# Altium PCB Rooftop_Unit_AgOpenGPS.pcbdoc
Units mm, origin at the board's own origin, x right, y up, seen from the top; angles counter-clockwise.
Board outline 109.35 x 87.6 mm, 2 copper layers (Top Layer, Bottom Layer); 28 components, 32 nets, 177 pads, 45 vias.
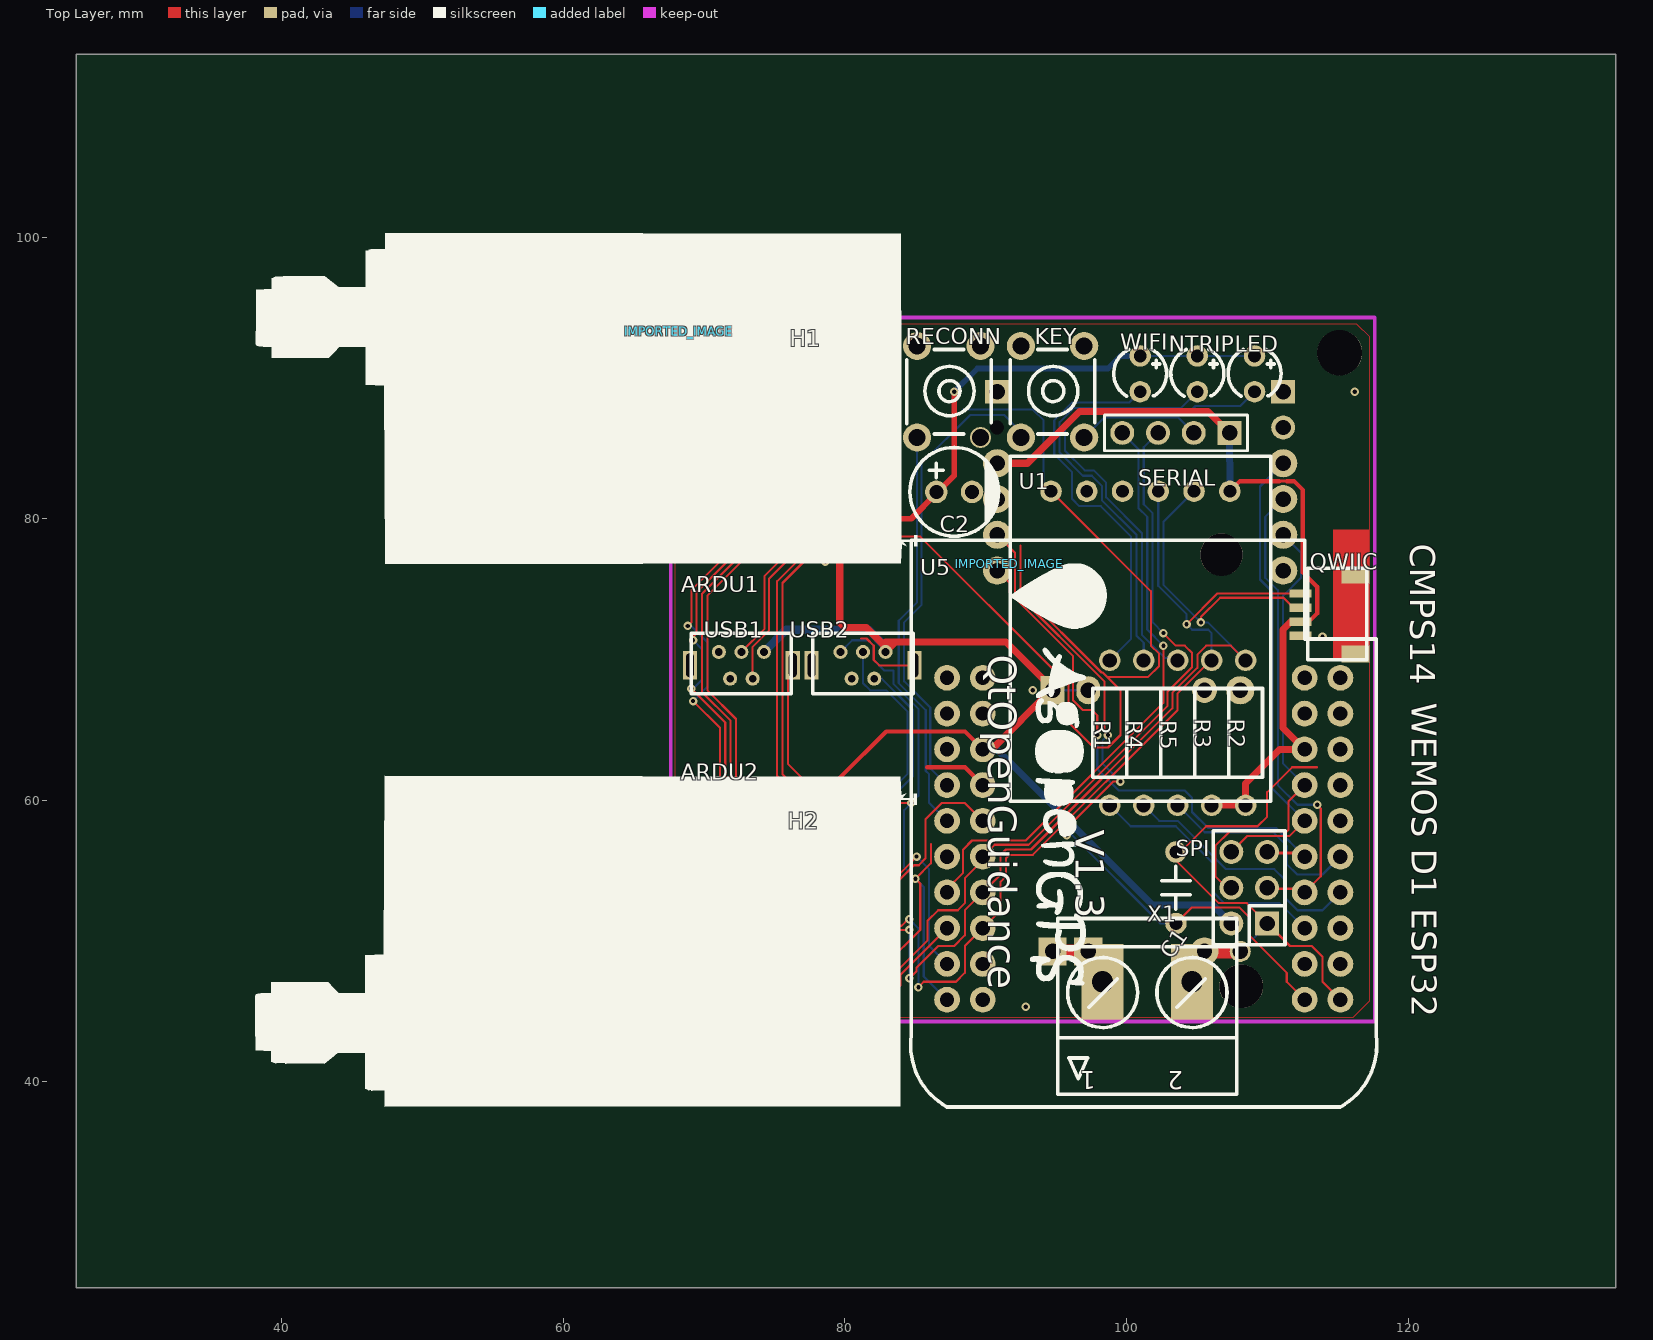
[diagram p0: Top Layer view]
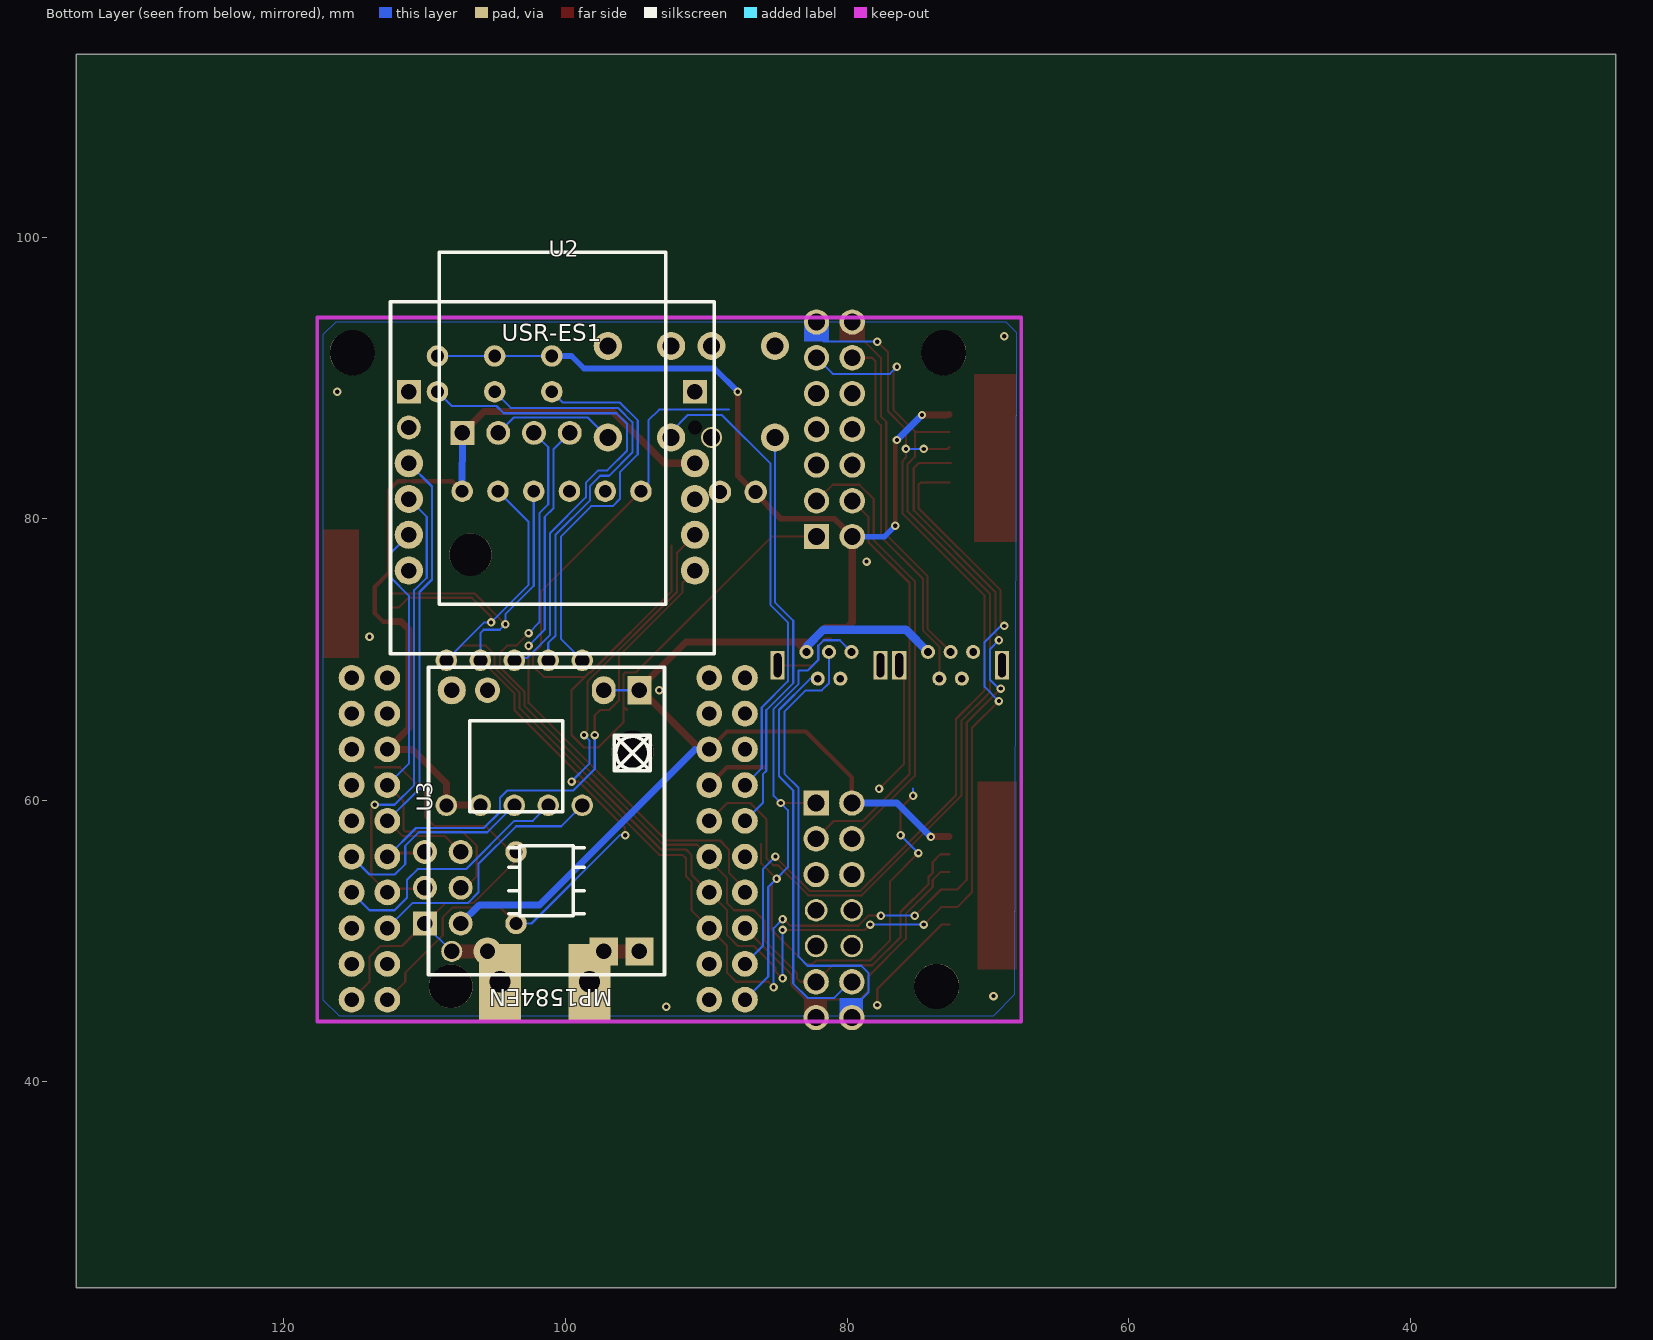
[diagram p1: Bottom Layer view, seen from below]

## Layer stack, top to bottom
Top Layer: signal copper (thickness not stored)
Dielectric: dielectric 0.32, FR-4, Dk 4.8
Bottom Layer: signal copper (thickness not stored)

## Board outline
134.746,25.4 25.4,25.4 25.4,112.998 134.746,112.998

## Components (designator, comment, footprint, x,y, rotation, side; value= is the part's Value field where it differs from the comment)
ARDU1 "SM06B-GHS-TB(LF)(SN)" CONN-TH_SM06B-GHS-TB-LF-SN 70.992,84.298 r270 top
ARDU2 "SM06B-GHS-TB(LF)(SN)" CONN-TH_SM06B-GHS-TB-LF-SN 70.992,54.298 r270 top
C1 "100nF" CAP-TH_L5.0-W2.5-P5.08-D0.7 103.504,53.798 r270 top
C2 "220uF" CAP-TH_BD6.3-P2.50-D1.0-FD 87.756,81.915 r0 top
H1 "A2541WV-2X7P" "ZED-F9P RTK INCASE PIN GNSS RECEIVER" 80.898,85.09 r90 top
H2 "A2541WV-2X7P" "ZED-F9P RTK INCASE PIN GNSS RECEIVER UPSIDE DOWN" 80.898,53.467 r90 top
IMPORTED_IMAGE "IMPORTED_IMAGE" IMPORTED_IMAGE 68.201,93.306 r0 top
IMPORTED_IMAGE "IMPORTED_IMAGE" IMPORTED_IMAGE 91.66,76.822 r0 top
KEY "K2-1102DP-M4SW-04" KEY-TH_4P-L6.0-W6.0-P4.50-LS7.5#1 94.741,89.027 r270 top
LED "BT-102GEK-31-572D" LED-TH_BD3.8-P2.54-FD 109.092,90.297 r270 top
NTRIP "BT-102GEK-31-572D" LED-TH_BD3.8-P2.54-FD 105.028,90.297 r270 top
QWIIC "QWIIC SMD JST" "QWIIC CONNECTOR" 113.156,72.898 r90 top
R1 "2.2K" RES-TH_BD2.4-L6.3-P10.30-D0.6 98.805,64.798 r90 top
R2 "2.2K" RES-TH_BD2.4-L6.3-P10.30-D0.6 108.457,64.798 r270 top
R3 "2.2K" RES-TH_BD2.4-L6.3-P10.30-D0.6 106.044,64.798 r270 top
R4 "2.2K" RES-TH_BD2.4-L6.3-P10.30-D0.6 101.218,64.798 r90 top
R5 "2.2K" RES-TH_BD2.4-L6.3-P10.30-D0.6 103.631,64.798 r90 top
RECONN "K2-1102DP-M4SW-04" KEY-TH_4P-L6.0-W6.0-P4.50-LS7.5#2 87.375,89.027 r270 top
SERIAL "A2541WV-4P" HDR-TH_4P-P2.54-V 103.504,86.106 r180 top
SPI "PM254V-12-06-H85" HDR-TH_6P-P2.54-V-F-R2-C3-S2.54 108.711,53.798 r90 top
U1 "CMPS14" CMPS14 110.235,84.455 r270 top
U2 "USR-ES1" USR-ES1 111.124,89.027 r0 bottom
U3 "MP1584EN" MP1584EN 94.741,49.276 r180 bottom
U5 "TG_WEMOS_D1_ESP32(CLONE)" "WEMOS-D1 ESP32" 115.188,43.307 r180 top
USB1 "USB-MINI-6.9X10.H-H3.9-DIP-V" MINI-USB-TH_C13453 72.643,69.596 r180 top
USB2 "USB-MINI-6.9X10.H-H3.9-DIP-V" MINI-USB-TH_C13453 81.279,69.596 r180 top
WIFI "BT-102GEK-31-572D" LED-TH_BD3.8-P2.54-FD 100.964,90.297 r270 top
X1 "AKL701_215" AKL701_2_15 101.472,47.117 r0 top

## Footprints (in the part's own frame and the unit in brackets; to place one, negate y for a bottom-side part, rotate by r counter-clockwise, add the part's x,y. Pads: shape width x height; smd on the part's side, far side on the other; paste and mask are expansions set on the pad)
AKL701_2_15 [mil]
  rect 118.15x212.6 hole 59: 1(-125,0) 2(125,0)
  silkscreen extent -250,-315 250,177
CAP-TH_BD6.3-P2.50-D1.0-FD [mm]
  round 1.6 hole 1: 1(-1.27,0) 2(1.27,0)
  silkscreen extent -3.15,-3.15 3.17,3.15
CAP-TH_L5.0-W2.5-P5.08-D0.7 [mil]
  round 60 hole 36: 1(-100,0) 2(100,0)
  silkscreen extent -60,-40 60,40
CMPS14 [mm]
  round 1.524 hole 0.914: 1(2.5,-2.9) 2(2.5,-5.44) 3(2.5,-7.98) 4(2.5,-10.52) 5(2.5,-13.06) 6(2.5,-15.6)
  round 3 hole 3 unplated: ""(7,-3.5) ""(21,-15)
  silkscreen extent 0,-18.5 24.5,0
CONN-TH_SM06B-GHS-TB-LF-SN [mil]
  rect 23.6x67 smd: 1(-123.05,68.87) 2(-73.84,68.87) 4(24.59,68.88) 5(73.8,68.88)
  rect 23.7x67 smd: 3(-24.62,68.88) 6(123.01,68.88)
  rect 39.4x106.3 smd: 7(-195.85,-68.86) 8(195.85,-68.87)
  silkscreen extent -182,-118 182,97
HDR-TH_4P-P2.54-V [mm]
  rect 1.7x1.7 hole 1.1: 1(-3.81,0)
  round 1.7 hole 1.1: 2(-1.27,0) 3(1.27,0) 4(3.81,0)
  silkscreen extent -5.08,-1.27 5.08,1.27
HDR-TH_6P-P2.54-V-F-R2-C3-S2.54 [mm]
  rect 1.7x1.7 hole 1.1: 1(-2.54,-1.27)
  round 1.7 hole 1.1: 2(-2.54,1.27) 3(0,-1.27) 4(0,1.27) 5(2.54,-1.27) 6(2.54,1.27)
  silkscreen extent -4.04,-2.54 4.04,2.54
IMPORTED_IMAGE [mm]
KEY-TH_4P-L6.0-W6.0-P4.50-LS7.5#1 [mm]
  round 2 hole 1.2: 1(-3.25,-2.25) 2(3.25,-2.25) 3(3.25,2.25) 4(-3.25,2.25)
  silkscreen extent -3,-3 3,3
KEY-TH_4P-L6.0-W6.0-P4.50-LS7.5#2 [mm]
  round 2 hole 1.2: 1(-3.25,-2.25) 2(3.25,-2.25) 4(-3.25,2.25)
  round 1.5 hole 1.2: 3(3.25,2.25)
  silkscreen extent -3,-3 3,3
LED-TH_BD3.8-P2.54-FD [mil]
  round 60 hole 35.43: 1(-50,0) 2(50,0)
  silkscreen extent -68,-74 63,74
MINI-USB-TH_C13453 [mm]
  round 1 hole 0.55: 1(-1.6,-0.95) 2(-0.8,0.95) 3(0,-0.95) 4(0.8,0.95) 5(1.6,-0.95)
  rect 1x2 hole 0.55 slot 1.7 at 90 deg: 6(3.65,0) 7(-3.65,0)
  silkscreen extent -3.56,-2.29 3.56,2.03
MP1584EN [mm]
  rect 2x2 hole 1.1: 1(-2.54,0) 1(0,0)
  round 1.5 hole 1.1: 2(-13.335,0)
  round 2 hole 1.1: 2(-10.795,0) 4(-13.335,18.55)
  oval 1.7x1.999 hole 1.1: 3(-2.54,18.55)
  rect 1.7x2 hole 1.1: 3(0,18.55)
  round 1.8 hole 1.1: 4(-10.795,18.55)
  silkscreen extent -14.99,-1.65 1.78,20.19
"QWIIC CONNECTOR" [mm]
  rect 0.6x1.55 smd: 1(-1.2,0.8) 2(-0.2,0.8) 3(0.8,0.8) 4(1.8,0.8)
  rect 1.2x2 smd: 5(3.1,-3.1) 6(-2.5,-3.1)
  silkscreen extent -2.9,-3.9 3.6,0.3
RES-TH_BD2.4-L6.3-P10.30-D0.6 [mm]
  round 1.524 hole 1: 1(-5.15,0) 2(5.15,0)
  silkscreen extent -3.15,-1.2 3.15,1.2
USR-ES1 [mm]
  rect 1.7x1.7 hole 1.1: 1(0,0) 12(-20.32,0)
  round 1.7 hole 1.1: 2(0,2.54)
  round 2 hole 1.1: 3(0,5.08) 4(0,7.62) 5(0,10.16) 6(0,12.7) 7(-20.32,12.7) 8(-20.32,10.16) 9(-20.32,7.62) 10(-20.32,5.08)
  round 0.1 hole 1 unplated: 11(-20.32,2.54)
  silkscreen extent -21.7,-9.9 1.3,18.6
"WEMOS-D1 ESP32" [mil]
  round 72 hole 40: 1(0,-100) 2(100,-100) 3(1000,-100) 4(1100,-100) 5(0,-200) 6(100,-200) 7(1000,-200) 8(1100,-200) 9(0,-300) 10(100,-300) 11(1000,-300) 12(1100,-300) 13(0,-400) 14(100,-400) 15(1000,-400) 16(1100,-400) 17(0,-500) 18(100,-500) 19(1000,-500) 20(1100,-500) 21(0,-600) 22(100,-600) 23(1000,-600) 24(1100,-600) 25(0,-700) 26(100,-700) 27(1000,-700) 28(1100,-700) 29(0,-800) 30(100,-800) 31(1000,-800) 32(1100,-800) 33(0,-900) 34(100,-900) 35(1000,-900) 36(1100,-900) 37(0,-1000) 38(1000,-1000) 39(100,-1000) 40(1100,-1000)
  silkscreen extent -102,-1384 1202,200
"ZED-F9P RTK INCASE PIN GNSS RECEIVER" [mm]
  rect 1.8x1.8 hole 1.2: 1(-6.35,-1.27)
  round 1.8 hole 1.2: 2(-6.35,1.27) 3(-3.81,-1.27) 4(-3.81,1.27) 5(-1.27,-1.27) 6(-1.27,1.27) 7(1.27,-1.27) 8(1.27,1.27) 9(3.81,-1.27) 10(3.81,1.27) 11(6.35,-1.27) 12(6.35,1.27) 13(8.89,-1.27) 14(8.89,1.27)
  silkscreen extent -8.29,-4.25 15.21,42.76
"ZED-F9P RTK INCASE PIN GNSS RECEIVER UPSIDE DOWN" [mm]
  rect 1.8x1.8 hole 1.2 copper offset 0.001,-0.001: 1(6.349,-1.299)
  round 1.8 hole 1.2: 2(6.349,1.241) 3(3.809,-1.299) 4(3.809,1.241) 5(1.269,-1.299) 6(1.269,1.241) 11(-6.351,-1.299) 12(-6.351,1.241) 13(-8.891,-1.299) 14(-8.891,1.241)
  round 1.6 hole 1.2: 7(-1.271,-1.299) 8(-1.271,1.241) 9(-3.811,-1.299) 10(-3.811,1.241)
  silkscreen extent -15.23,-4.21 8.27,42.8

## Free pads (board coordinates)
  round 3.2 hole 3.2 unplated: ""(73.14,91.798) ""(73.64,46.798) ""(115.14,91.798)
  round 0.9 hole 0.9 unplated: ""(90.804,86.487)
  round 3.1 hole 3.1 unplated: ""(108.14,46.798)

## Via types
v1: diameter 0.6, hole 0.3, Top Layer to Bottom Layer, 38 vias
v2: diameter 0.61, hole 0.305, Top Layer to Bottom Layer, 7 vias

## Nets (pads, with @x,y where several pads share a name; then routed paths per layer and width w, separated by ;. In a path a pad name is that pad's centre, name@x,y a point inside that pad or via, vN(x,y) a via of type N, cw(c..) or ccw(c..) an arc to the next point about the centre after c; other vN are vias at no path point)
+3V3: QWIIC.2 R2.2 R3.2 SERIAL.1 U1.1 U2.10 U5.30 | length 64
  Top Layer w0.2: U1.1 108.057,82.677 111.405,82.677
  Top Layer w0.3: U1.1 108.057,82.677 110.844,82.677 ; 111.404,82.677 111.886,82.677 112.521,82.042 112.521,76.187 113.537,75.171 113.537,73.279 112.956,72.697 QWIIC.2
  Top Layer w0.5: U2.10 92.963,83.947 96.646,87.63 105.79,87.63 SERIAL.1 ; R3.2@106.044,59.69 R2.2@108.457,59.69 ; R2.2 108.457,61.214 110.87,63.627 U5.30 111.124,65.151 111.124,69.723 ; 111.124,68.468 111.124,72.136 111.686,72.698 QWIIC.2
  Bottom Layer w0.5: SERIAL.1 U1.1
+5V: ARDU1.1 ARDU2.1 C2.1 H1.2 H2.2 LED.1 NTRIP.1 SPI.2 U3.3 U5.31 USB1.1 USB2.1 WIFI.1 | length 141.5
  Top Layer w0.3: v1(76.453,85.598) 76.58,85.598 v1(76.58,79.502) ; H2.2 79.658,61.625 82.93,64.897 88.518,64.897 U5.31
  Top Layer w0.4: H1.2 80.898,80.01 84.708,80.01 C2.1@86.486,81.788 ; C2.1 C2.1@86.486,81.788 ; v1(87.756,89.027) 87.756,83.058 C2.1@86.486,81.788
  Top Layer w0.5: ARDU2.1@72.742,57.423 74.021,57.423 v1(74.04,57.404) ; ARDU1.1 72.946,87.376 v1(74.675,87.376) ; H1.2 79.628,72.644 80.009,72.263 81.533,72.263 82.879,70.917 USB2.1 83.58,71.247 91.439,71.247 94.741,67.945 90.423,63.627 U5.31 ; 82.879,71.252 83.987,71.247
  Bottom Layer w0.15: U3.3@94.741,67.826 U3.3@97.281,67.826 ; WIFI.1 LED.1
  Bottom Layer w0.4: v1(76.58,79.502) 77.342,78.74 H1.2 ; v1(87.756,89.027) 89.407,90.678 98.678,90.678 99.567,91.567 WIFI.1
  Bottom Layer w0.5: v1(74.04,57.404) 76.453,59.817 H2.2@79.658,59.817 ; v1(74.675,87.376) v1(76.453,85.598) ; U5.31 90.804,63.627 101.853,52.578 106.12,52.578 SPI.2
  Bottom Layer w0.6: USB1.1 75.833,72.136 81.66,72.136 82.879,70.917 USB2.1
_KEY1: RECONN.2 U5.24 | length 29.2
  Bottom Layer w0.15: RECONN.2@85.125,85.778 85.125,74.077 83.819,72.771 83.819,68.326 85.739,66.406 85.739,62.088 85.978,61.849 85.978,59.817 U5.24
_KEY2: KEY.2 U5.28 | length 34.5
  Bottom Layer w0.15: U5.28@87.756,61.087 U5.28 86.057,62.278 86.057,66.596 84.2,68.453 84.2,72.644 85.427,73.871 85.427,83.904 88.899,87.376 91.312,87.376 92.491,86.197 KEY.2@92.491,85.778
_LED1: R1.1 U5.10 | length 18.6
  Bottom Layer w0.15: R1.1 100.286,58.166 103.504,58.166 106.171,55.499 106.171,53.467 106.933,52.705 110.87,52.705 U5.10
_LED2: R4.1 U5.13 | length 18.3
  Bottom Layer w0.15: R4.1 102.318,58.547 103.631,58.547 107.06,55.118 110.489,55.118 111.251,54.356 111.251,53.086 112.14,52.197 113.918,52.197 U5.13
_LED3: R5.1 U5.17 | length 14.9
  Bottom Layer w0.15: R5.1 105.542,57.737 110.41,57.737 111.378,56.769 111.378,55.473 112.115,54.737 113.918,54.737 U5.17
_RESET: C1.2 U2.8 U5.2 | length 50.9
  Top Layer w0.15: U2.8 92.074,77.597 92.074,74.803 98.424,68.453 98.424,65.024 v1(98.678,64.643) ; v1(95.757,57.531) 95.757,58.039 99.059,61.341 v1(99.567,61.341) ; C1.2 104.65,52.403 107.997,52.403 108.711,51.689 108.711,50.419 111.378,47.752 111.378,47.117 U5.2
  Bottom Layer w0.15: v1(95.757,57.531) 96.138,57.531 102.412,51.257 C1.2 ; v1(98.678,64.643) 98.297,64.262 98.297,62.611 v1(99.567,61.341)
F9P'_1>2: H1.3 H2.4 | length 32.2
  Top Layer w0.15: H2.4 75.183,61.752 75.183,75.565 78.104,78.486 78.104,81.407 79.12,82.423 81.025,82.423 H1.3
F9P_2'>1: H1.4 H2.3 | length 29.6
  Top Layer w0.15: H1.4 78.485,80.137 78.485,78.359 75.564,75.438 75.564,61.849 78.866,58.547 80.929,58.547 H2.3@82.199,57.277
GND: ARDU1.6 ARDU1.7 ARDU1.8 ARDU2.6 ARDU2.7 ARDU2.8 C1.1 C2.2 H1.1 H2.1 KEY.3 KEY.4 QWIIC.1 QWIIC.5 QWIIC.6 RECONN.3 RECONN.4 SERIAL.2 SPI.1 U1.6 U2.1 U2.2 U2.9 U2.12 U3.2 U3.4 U5.1 U5.4 U5.27 USB1.5 USB1.6 USB1.7 USB2.5 USB2.6 USB2.7 X1.2 | length 212.9
  Top Layer w0.15: ARDU2.6 73.286,51.174 74.04,50.419 77.85,46.609 v1(77.85,45.466) ; v1(74.929,56.261) 76.961,54.229 76.961,53.213 76.961,50.038 77.469,49.53 78.369,48.63 82.179,48.63 82.422,48.387 82.803,48.387 82.93,48.387 85.343,50.8 85.343,54.102 v1(85.005,54.44) 86.105,55.54 86.105,56.896 ; v1(75.31,60.325) 76.199,59.436 v1(76.199,57.531) ; USB1.7 75.945,69.248 75.945,62.611 v1(77.723,60.833) ; 81.152,71.501 81.533,71.501 82.041,70.993 82.041,69.977 82.422,69.596 USB2.7 ; H1.1 85.343,78.74 94.995,69.088 95.757,69.088 95.884,68.961 95.884,66.675 95.63,66.421 ; H2.1@82.199,59.817 v1(84.708,59.817) ; 92.455,78.105 92.455,74.849 98.216,69.088 98.297,69.088 99.567,67.818 99.567,64.643 98.678,63.754 97.662,63.754 95.884,65.532 95.884,67.265 ; U1.6 101.726,74.864 101.726,70.993 102.313,70.406 102.313,69.548 101.518,68.753 98.632,68.753 ; 108.07,52.705 108.534,52.705 SPI.1 111.582,49.657 112.454,49.657 ; 108.203,52.705 106.552,52.705 103.504,55.753 103.504,56.007 105.663,58.166 109.3,58.166 109.981,58.847 109.981,60.579 111.759,62.357 113.537,62.357 ; SPI.1@109.981,50.927 110.362,50.927 111.632,49.657 113.156,49.657 113.918,48.895 113.918,47.117 U5.1
  Top Layer w0.3: 85.851,62.357 88.518,62.357 U5.27
  Top Layer w1: X1.2@105.536,49.276 U3.2@108.076,49.276
  Bottom Layer w0.15: v1(74.929,56.261) v1(76.199,57.531) ; v1(75.31,60.325) 75.31,60.833 ; USB2.5 80.507,71.374 81.66,71.374 82.041,70.993 82.041,69.977 82.803,69.215 83.438,69.215 83.438,68.28 85.216,66.502 85.216,60.325 v1(84.708,59.817) 84.2,59.309 84.2,55.245 v1(85.005,54.44) 85.597,53.848 85.597,47.498 U5.4 ; 88.391,87.757 93.344,87.757 94.106,86.995 94.106,82.484 U1.6 ; KEY.3 98.415,87.201 103.679,87.201 SERIAL.2 ; U3.2@108.076,49.276 109.981,51.181 SPI.1
  other v2: 92.836,45.339 69.595,46.101 93.344,67.818 113.918,71.628 78.612,76.962 116.204,89.027 68.833,92.964
MISO: SPI.5 U2.7 U5.18 | length 38.2
  Top Layer w0.15: U2.7 91.693,75.438 91.693,74.757 96.186,70.264 96.186,67.135 96.9,66.421 97.535,66.421 97.916,66.04 v1(97.916,64.643) v1@97.738,64.643
  Top Layer w0.2: SPI.5@110.045,56.261 U5.18@112.712,56.261
  Bottom Layer w0.15: v1(97.916,64.643) 97.916,62.23 99.44,60.706 104.139,60.706 104.647,60.198 104.647,59.182 105.79,58.039 110.616,58.039 U5.18
MOSI: SPI.6 U2.3 U5.22 | length 33.5
  Top Layer w0.15: SPI.6 108.586,57.483 111.584,57.483 U5.22
  Bottom Layer w0.15: U2.3 109.473,82.296 109.473,75.692 110.362,74.803 110.362,60.833 U5.22
OUT: SERIAL.4 U5.16 | length 42.4
  Top Layer w0.15: U5.16 87.248,53.721 88.391,54.864 88.391,56.515 89.026,57.15 92.836,57.15 102.615,66.929 v1(102.615,70.993)
  Bottom Layer w0.15: SERIAL.4 100.837,84.963 100.837,80.772 101.472,80.137 101.472,72.136 v1(102.615,70.993)
R1_2: R1.2 WIFI.2 | length 27.8
  Bottom Layer w0.15: R1.2 100.329,71.472 100.329,78.74 98.17,80.899 96.646,80.899 96.138,81.407 96.138,83.312 94.868,84.582 94.868,86.995 96.138,88.265 100.202,88.265 WIFI.2
R4_2: NTRIP.2 R4.2 | length 30.4
  Bottom Layer w0.15: R4.2 101.218,71.189 100.71,71.697 100.71,78.867 98.249,81.328 98.249,82.344 97.535,83.058 96.9,83.058 95.249,84.709 95.249,86.868 96.265,87.884 103.885,87.884 NTRIP.2
R5_2: LED.2 R5.2 | length 35.3
  Bottom Layer w0.15: R5.2 103.476,70.104 102.742,70.104 101.091,71.755 101.091,78.994 98.551,81.534 98.551,82.55 97.662,83.439 97.027,83.439 95.63,84.836 95.63,86.741 96.392,87.503 104.393,87.503 104.901,88.011 108.076,88.011 LED.2
RXD1: ARDU1.2 H1.11 U5.23 | length 69.3
  Top Layer w0.15: ARDU1.2 75.124,86.174 75.183,86.233 ; v1(76.453,90.805) 76.707,90.551 76.707,87.757 75.183,86.233 ; U5.23 88.518,59.817 86.867,59.817 85.724,58.674 85.724,55.88 85.239,55.395 84.904,55.395 82.765,53.256 78.95,53.256 71.881,60.325 71.881,65.659 69.849,67.691 69.849,74.676 75.691,80.518 75.691,83.899 75.183,84.407 75.183,86.233
  Bottom Layer w0.15: v1(76.453,90.805) 76.961,90.297 78.866,90.297 81.025,90.297 H1.11
RXD2: ARDU2.2 H2.11 SERIAL.3 U5.19 | length 68.4
  Top Layer w0.15: ARDU2.2@72.742,56.175 73.367,56.175 73.913,55.626 73.913,54.864 74.215,54.562 74.215,54.054 76.199,52.07 76.199,50.292 78.201,48.29 81.025,48.29 82.199,47.117 83.311,47.117 83.565,47.371 83.565,47.752 85.851,50.038 85.851,51.435 86.613,52.197 88.01,52.197 88.518,52.705 88.518,54.483 89.788,55.753 U5.19 90.629,56.848 93.042,56.848 102.918,66.723 102.918,67.739 104.647,69.469 104.647,70.485 104.139,70.993 103.504,70.993 v1(102.615,71.882) ; U5.19@89.74,55.999 U5.19@89.781,55.999
  Bottom Layer w0.15: SERIAL.3 101.218,85.09 101.218,81.026 101.853,80.391 101.853,72.644 v1(102.615,71.882)
S$6: 
S$8: 
SCK: SPI.3 U2.4 U5.14 | length 34.1
  Top Layer w0.15: U5.14 113.791,54.61 113.791,59.436 v1(113.537,59.69)
  Top Layer w0.2: SPI.3@109.918,53.721 U5.14@112.585,53.721
  Bottom Layer w0.15: U2.4 109.854,80.137 109.854,75.819 110.743,74.93 110.743,61.087 112.14,59.69 v1(113.537,59.69)
SCL: ARDU1.4 ARDU2.4 QWIIC.4 R3.1 U1.3 U5.11 | length 114.2
  Top Layer w0.15: v1(69.087,67.945) 71.5,65.532 71.5,54.737 ; v1@69.087,71.501 69.468,71.882 69.468,74.803 75.262,80.597 75.262,83.614 74.919,83.957 ARDU1.4@72.615,83.957 ; 71.5,54.869 71.5,54.356 72.183,53.673 ARDU2.4 73.326,53.673 v1(75.183,51.816) ; v1(77.596,51.816) 78.485,51.816 79.199,51.102 84.022,51.102 v1@84.532,51.612 ; v1(85.216,46.736) 85.597,47.117 87.419,47.117 ; 86.613,47.117 87.883,47.117 88.518,47.752 88.518,49.657 U5.11 91.058,52.197 91.058,54.229 91.439,54.61 91.439,55.88 91.693,56.134 93.344,56.134 103.631,66.421 103.631,67.6 105.981,69.949 R3.1 ; v1(104.266,72.517) 106.447,74.698 QWIIC.4
  Bottom Layer w0.15: v1(69.087,67.945) 69.214,67.945 69.849,68.58 69.849,70.739 v1(69.214,71.374) ; v1(75.183,51.816) v1(77.596,51.816) ; v1(84.581,51.562) 85.216,50.927 v1(85.216,46.736) ; U1.3 102.255,75.245 104.266,73.233 v1(104.266,72.517) 104.665,72.118 105.808,72.118 106.044,71.882 R3.1
SDA: ARDU1.5 ARDU2.5 QWIIC.3 R2.1 U1.2 U5.15 | length 115
  Top Layer w0.15: v1(68.833,72.39) 69.087,72.644 69.087,74.93 74.929,80.772 74.929,82.423 74.772,82.58 ARDU1.5@72.742,82.58 ; v1(69.214,67.056) 71.119,65.151 71.119,53.975 ; 71.119,54.07 71.119,53.467 72.163,52.423 ARDU2.5 73.306,52.423 v1(74.548,51.181) ; v1(78.358,51.181) 78.739,50.8 v1(84.581,50.8) ; v1(84.581,47.371) 85.089,47.879 85.089,48.133 86.613,49.657 87.756,49.657 88.518,50.419 88.518,52.197 U5.15 91.058,54.737 91.058,56.134 91.439,56.515 93.217,56.515 103.25,66.548 103.25,67.645 105.028,69.423 105.028,70.358 105.663,70.993 107.413,70.993 R2.1 ; v1(105.282,72.644) 105.282,73.025 106.654,74.397 111.15,74.397 111.848,73.698 QWIIC.3
  Bottom Layer w0.15: v1(68.833,72.39) 69.087,72.39 70.23,71.247 70.23,68.072 v1(69.214,67.056) ; v1(74.548,51.181) v1(78.358,51.181) ; v1(84.581,47.371) v1(84.581,50.8) ; U1.2 102.615,79.776 102.615,75.311 v1(105.282,72.644) 105.761,72.644 R2.1
SS_SPI: SPI.4 U2.5 U5.26 | length 32.6
  Top Layer w0.15: SPI.4@107.441,53.467 106.298,54.61 106.298,56.769 107.314,57.785 111.378,57.785 111.505,57.912 111.505,59.944 U5.26
  Bottom Layer w0.15: U2.5 112.394,77.597 112.394,75.819 111.124,74.549 111.124,62.611 U5.26
TXD1: ARDU1.3 H1.13 U5.8 | length 70.7
  Top Layer w0.15: ARDU1.3@72.742,85.08 72.859,84.963 v1(74.548,84.963) ; v1(77.85,92.583) 77.088,91.821 77.088,87.63 75.818,86.36 75.818,84.353 76.072,84.099 76.072,80.391 70.23,74.549 70.23,67.818 72.262,65.786 72.262,60.371 79.074,53.558 82.641,53.558 83.121,54.038 ; 82.724,53.642 v1(85.089,56.007)
  Bottom Layer w0.15: v1(74.548,84.963) v1(75.818,84.963) ; v1(77.85,92.583) 81.66,92.583 82.168,93.091 H1.13 ; v1(85.089,56.007) 85.978,55.118 85.978,49.657 U5.8
TXD2: ARDU2.3 H2.13 U5.12 | length 24.5
  Top Layer w0.15: ARDU2.3@72.742,54.922 73.347,54.922 73.913,54.356 73.913,53.848 75.818,51.943 75.818,50.165 78.485,47.498 78.485,46.482 79.12,45.847 81.533,45.847 82.199,45.182 82.199,44.577 82.199,45.115 83.946,46.863 83.946,47.625 U5.12
U3_1: U3.1 X1.1 | length 2.5
  Top Layer w1: U3.1@94.741,49.276 X1.1@97.281,49.276
USB_D+1: H1.14 USB1.3 | length 26.3
  Top Layer w0.15: USB1.3 74.294,72.197 74.294,75.946 77.215,78.867 77.215,86.891 77.596,87.272 77.596,91.44 79.628,93.472 H1.14
USB_D+2: H2.14 USB2.3 | length 33.1
  Bottom Layer w0.15: H2.14@79.659,44.577 79.659,45.182 78.485,46.355 78.485,47.752 78.993,48.26 82.803,48.26 83.438,48.895 83.438,60.879 84.454,61.895 84.454,66.294 82.93,67.818 81.787,67.818 81.279,68.326 USB2.3
USB_D-1: H1.12 USB1.2 | length 26.2
  Top Layer w0.15: USB1.2 73.443,70.904 74.614,72.075 74.614,75.758 77.596,78.74 77.596,86.65 77.977,87.031 77.977,91.186 78.231,91.44 H1.12
USB_D-2: H2.12 USB2.2 | length 28.6
  Bottom Layer w0.15: H2.12@79.659,47.117 79.755,47.117 80.898,45.974 82.803,45.974 83.819,46.99 83.819,60.706 84.835,61.722 84.835,66.421 82.61,68.646 USB2.2
pads on no net: H1.5 H1.6 H1.7 H1.8 H1.9 H1.10 H2.5 H2.6 H2.7 H2.8 H2.9 H2.10 KEY.1 RECONN.1 U1. U1.4 U1.5 U2.6 U2.11 U5.3 U5.5 U5.6 U5.7 U5.9 U5.20 U5.21 U5.25 U5.29 U5.32 U5.33 U5.34 U5.35 U5.36 U5.37 U5.38 U5.39 U5.40 USB1.4 USB2.4

## Polygon pours and split planes (outlines as drawn)
GND on Bottom Layer (solid): 67.944,93.218 68.706,93.98 71.373,93.98 116.331,93.98 117.22,93.091 117.22,45.847 116.077,44.704 69.595,44.704 68.071,46.228
GND on Top Layer (solid): 67.944,93.091 68.706,93.853 116.331,93.853 117.22,92.964 117.22,45.72 116.077,44.577 69.595,44.577 68.071,46.101 67.944,46.228

## Other copper
Top Layer:
  rectangle net GND: 114.68,70.104 117.22,79.248
  rectangle net GND: 67.944,48.006 70.738,61.341
  rectangle net GND: 67.944,78.359 70.992,90.297
  rectangle net USB_D+1: 78.739,92.583 80.517,93.98
  rectangle net TXD2: 81.406,44.577 83.057,45.974
Bottom Layer:
  rectangle net TXD1: 81.279,92.583 83.057,93.98
  rectangle net USB_D+2: 78.866,44.704 80.517,45.974

## Silkscreen, mask and mechanical layers (free items; w line width, h text height)
Top Overlay:
  text "QtOpenGuidance" at 90.169,70.358 h2.03 r270
  text "V1.3" at 96.392,57.912 h2.03 r270

## Text inside footprints (layer, text, board x,y; h text height)
QWIIC: Document "SCL" at 113.656,74.498 h0.2 r90; Document "SDA" at 113.656,73.398 h0.2 r90; Document "3.3V" at 113.656,72.398 h0.2 r90; Document "GND" at 113.656,71.398 h0.2 r90
U5: Top Overlay "WEMOS D1 ESP32" at 120.268,66.929 h1.78 r270
X1: Top Overlay "1" at 97.814,40.767 h1.27 r180; Top Overlay "2" at 104.011,40.767 h1.27 r180